# EAGLE board amebot2 (EAGLE 6.5.0)
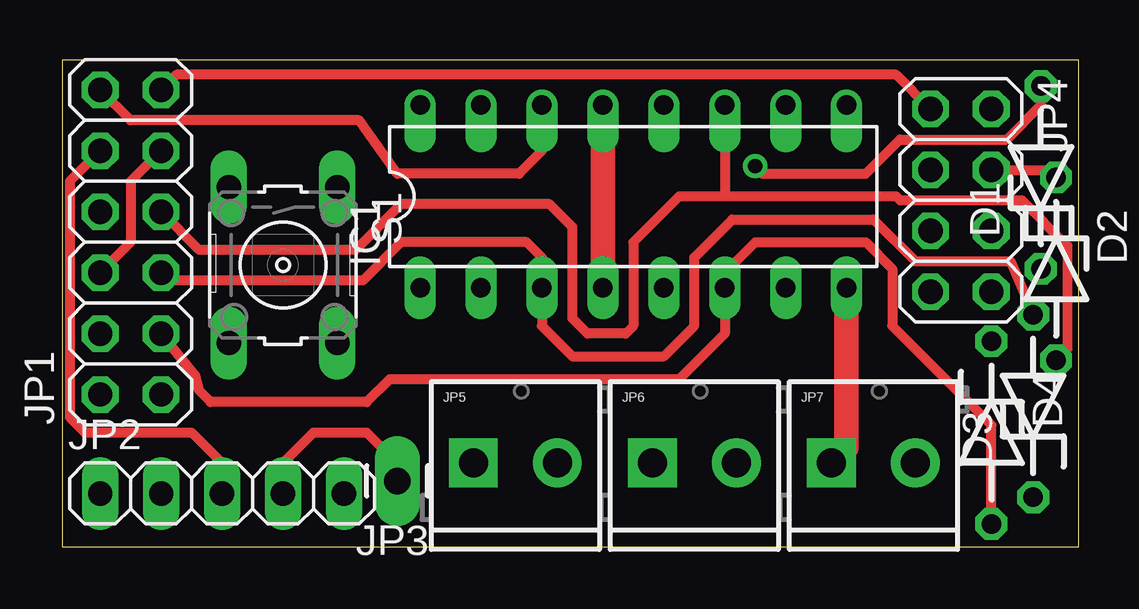
[diagram p0: board, top side]
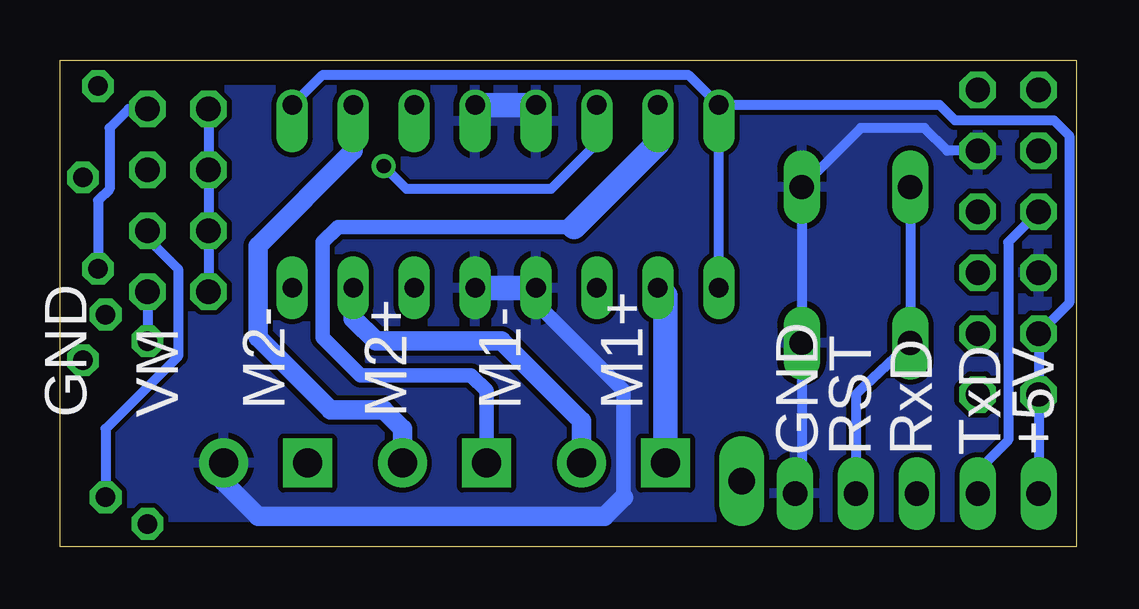
[diagram p1: board, bottom side, seen from below]

Size 42.37 x 20.3 mm. Coordinates in mm from the lower left corner, seen from the top.
Outline: 42.37,0 42.37,20.3 0,20.3 0,0 42.37,0
Copper layers (1*16): Top 0.035mm / dielectric 1.5mm / Bottom 0.035mm
Design rules "default": minimum track width 10mil, minimum drill 24mil, track to track 8mil, track to pad 8mil, pad to pad 8mil, via to via 8mil, smd to smd 8mil, copper to edge 40mil, drill to drill 8mil, minimum pad ring 10mil, minimum via ring 8mil, stop-mask expansion 4mil, vias tented up to drill 0mil, thermal gap 10mil

## Footprints (pad centres in the part's own frame; a part is rotated, then mirrored left to right if it is on the bottom)
ZDIO-7.5 = drill 0.813 octagon: A 3.81,0; C -3.81,0
DIL16VAR = drill 0.813 long: 1 -7.62,-3.81; 2 -5.08,-3.81; 3 -2.54,-3.81; 4 0,-3.81; 5 2.54,-3.81; 6 5.08,-3.81; 7 7.62,-3.81; 8 10.16,-3.81 | drill 0.813 offset: 9 10.16,3.81; 10 7.62,3.81; 11 5.08,3.81; 12 2.54,3.81; 13 0,3.81; 14 -2.54,3.81; 15 -5.08,3.81; 16 -7.62,3.81
2X06 = drill 1.016 octagon: 1 -6.35,-1.27; 2 -6.35,1.27; 3 -3.81,-1.27; 4 -3.81,1.27; 5 -1.27,-1.27; 6 -1.27,1.27; 7 1.27,-1.27; 8 1.27,1.27; 9 3.81,-1.27; 10 3.81,1.27; 11 6.35,-1.27; 12 6.35,1.27
1X05 = drill 1.016 long: 1 -5.08,0; 2 -2.54,0; 3 0,0; 4 2.54,0; 5 5.08,0
1X01_LONGPAD = drill 1.118 pad 1.88 long: 1 0,0
2X04 = drill 1.016 octagon: 1 -3.81,-1.27; 2 -3.81,1.27; 3 -1.27,-1.27; 4 -1.27,1.27; 5 1.27,-1.27; 6 1.27,1.27; 7 3.81,-1.27; 8 3.81,1.27
SCREWTERMINAL-3.5MM-2 = drill 1.2 pad 2.032 square: 1 0,0 | drill 1.2 pad 2.032: 2 3.5,0
B3F-10XX = drill 1.016 long: 1 -3.251,2.261; 2 3.251,2.261; 3 -3.251,-2.261; 4 3.251,-2.261

## Placement (x,y rotation side)
D1  [ZDIO-7.5]  40.79,15.4 90 top
D2  [ZDIO-7.5]  41.42,11.59 270 top
D3  [ZDIO-7.5]  40.47,5.87 90 top
D4  [ZDIO-7.5]  38.72,4.76 270 top
IC1  L293DB  [DIL16VAR]  22.53,14.61 0 top
JP1  [2X06]  2.84,12.7 90 top
JP2  [1X05]  6.66,2.22 0 top
JP3  [1X01_LONGPAD]  13.96,2.74 180 top
JP4  [2X04]  37.45,14.45 270 top
JP5  M023.5MM  [SCREWTERMINAL-3.5MM-2]  17.13,3.49 0 top
JP6  M023.5MM  [SCREWTERMINAL-3.5MM-2]  24.59,3.49 0 top
JP7  M023.5MM  [SCREWTERMINAL-3.5MM-2]  32.05,3.49 0 top
S1  [B3F-10XX]  9.2,11.75 270 top

## Library data of the parts
D1-D4 = diode
IC1 = st-microelectronics
JP1 JP2 JP4 = pinhead
JP3 JP5-JP7 = SparkFun-Connectors
S1 = switch-omron; MPN: B3F-1000; OC_FARNELL: 176432; OC_NEWARK: 36M3542

## Nets
GND: IC1.4 IC1.5 IC1.12 IC1.13 JP1.6 JP1.9 JP2.5 JP7.2 S1.1 S1.2
N$1: D1.C JP4.2
N$2: JP2.4 JP3.1 S1.3 S1.4
N$3: D4.A IC1.6 JP1.3
N$4: D3.A IC1.3 JP1.5
N$5: JP1.11 JP4.1 JP4.3 JP4.5 JP4.7
N$6: D1.A IC1.14 JP1.12
N$7: JP1.8 JP2.2
N$8: IC1.2 JP5.1
N$9: IC1.7 JP5.2
N$10: IC1.15 JP6.1
N$11: IC1.10 JP6.2
N$12: IC1.8 JP7.1
N$13: JP1.10 JP2.3
N$14: D2.A IC1.11 JP1.7
N$15: D2.C JP4.4
N$16: D3.C JP4.6
N$17: D4.C JP4.8
VCC: IC1.1 IC1.9 IC1.16 JP1.2 JP1.4 JP2.1

## Tracks (layer width: path | path; a pad name or v marks a point on that pad's centre or on a via)
GND
  Top 0.406: JP1.9 2.84,15.24 2.84,12.7 JP1.6
  Top 1.016: IC1.13 IC1.4
  Bottom 0.406: JP1.9 5.38,16.51 6.34,17.46 8.99,17.46 S1.1 S1.2 11.46,2.58 JP2.5
  Bottom 0.61: IC1.4 22.53,10.16 18.88,6.51 18.88,2.06
  Bottom 0.813: 18.88,2.06 19.67,1.27 34.12,1.27 35.55,2.7 JP7.2
  Bottom 1.016: IC1.12 IC1.13 | IC1.5 IC1.4
  pour Bottom: 0.3,20 42.06,20 42.06,0.32 0.3,0.32
N$1
  Bottom 0.406: JP4.2 39.52,18.26 40.31,17.46 40.31,14.92 40.79,14.45 D1.C
N$2
  Top 0.406: JP2.4 9.19,3.49 10.46,4.76 12.69,4.76 13.96,3.49 JP3.1
  Bottom 0.406: S1.3 S1.4 8.84,6.71 9.19,6.35 JP2.4
N$3
  Top 0.406: D4.A 38.72,5.08 34.6,9.21 34.6,11.59 33.48,12.7 28.88,12.7 27.61,11.43 IC1.6 27.61,8.89 25.71,6.99 13.64,6.99 12.69,6.03 6.18,6.03 5.7,6.51 5.54,7.14 JP1.3
N$4
  Top 0.406: JP1.5 4.43,11.11 12.53,11.11 14.12,12.7 19.35,12.7 19.99,12.06 IC1.3 19.99,9.21 21.26,7.94 25.07,7.94 26.34,9.21 26.34,12.06 27.93,13.65 33.8,13.65 35.55,11.91 39.52,11.91 D3.A
N$5
  Top 0.406: JP1.11 4.75,19.68 34.75,19.68 JP4.1
  Bottom 0.406: JP4.1 JP4.3 JP4.5 JP4.7
N$6  (via drill 0.6)
  Top 0.406: IC1.14 19.99,16.51 19.04,15.56 13.96,15.56 12.37,17.78 2.84,17.78 JP1.12 | v28.88,15.88 29.2,15.56 33.48,15.56 34.91,16.99 39.36,16.99 40.79,18.41 D1.A
  Bottom 0.406: IC1.14 19.99,16.83 21.89,14.92 27.93,14.92 v28.88,15.88
N$7
  Bottom 0.406: JP1.8 2.84,12.7 2.84,4.45 4.12,3.17 JP2.2
N$8
  Bottom 1.016: IC1.2 17.13,10.48 JP5.1
N$9
  Bottom 0.813: IC1.7 30.15,9.53 29.2,8.57 23.96,8.57 20.62,5.24 JP5.2
N$10
  Bottom 0.61: 20.94,13.34 30.78,13.34 31.42,12.7 31.42,8.73 29.83,7.14 25.23,7.14 24.59,6.51 JP6.1
  Bottom 1.016: 20.94,13.34 17.45,16.83 IC1.15
N$11
  Bottom 0.813: IC1.10 30.15,16.51 34.12,12.54 34.12,8.73 31.1,5.71 28.88,5.71 28.09,4.92 JP6.2
N$12
  Top 1.016: IC1.8 32.69,4.13 JP7.1
N$13
  Top 0.406: JP1.10 0.31,15.24 0.31,5.4 0.94,4.76 5.38,4.76 6.66,3.49 JP2.3
N$14
  Top 0.406: IC1.11 27.61,14.61 | JP1.7 5.7,12.38 12.21,12.38 14.12,14.29 20.31,14.29 21.26,13.34 21.26,9.53 21.89,8.89 23.48,8.89 23.8,9.21 23.8,12.7 25.71,14.61 27.61,14.61 | 27.61,14.61 34.75,14.61 34.91,14.45 39.99,14.45 41.9,12.54 41.9,8.26 D2.A
N$15
  Top 0.406: JP4.4 41.1,15.72 D2.C
N$16
  Bottom 0.406: JP4.6 38.72,12.86 37.45,11.59 37.45,7.94 40.47,4.92 D3.C
N$17
  Bottom 0.406: JP4.8 D4.C
VCC
  Bottom 0.406: JP2.1 JP1.2 JP1.4 0.31,10.16 0.31,17.14 0.94,17.78 5.07,17.78 5.7,18.41 IC1.16 | IC1.9 31.42,19.68 16.18,19.68 IC1.16 | IC1.1 IC1.16

## Text on the board
bPlace: M1+ | M1- | M2- | M2+ | VM | GND | +5V | TxD | RxD | RST | GND